# EAGLE board Line_Sensor v3 (EAGLE 9.7.0)
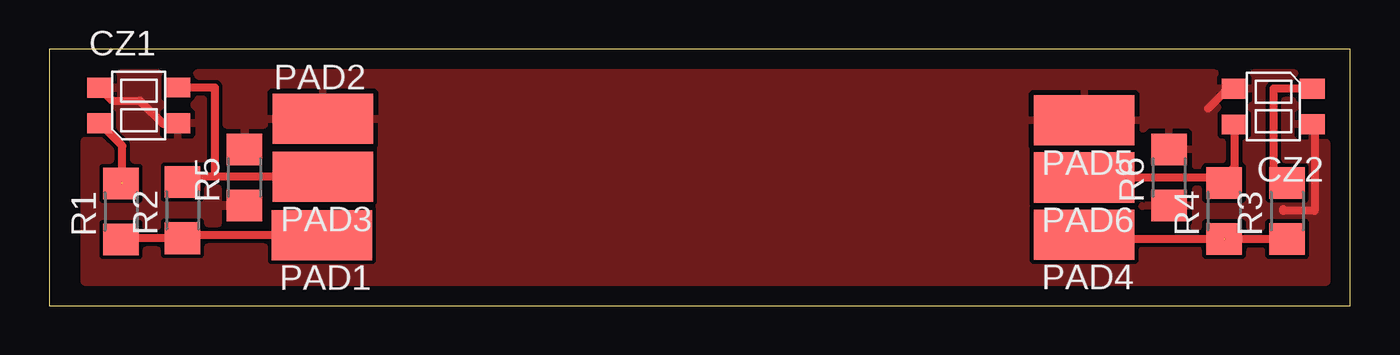
[diagram p0: board, top side]

Size 66 x 13 mm. Coordinates in mm from the lower left corner, seen from the top.
Outline: 0,0 66,0 66,13 0,13 0,0
Copper layers (1*16): Top / Bottom
Stack-up Default Layer Stack: Top User Defined 0.035mm / Dielectric-1 User Defined 1.5mm / Bottom User Defined 0.035mm
Design rules: minimum copper width 10mil, minimum drill size 24mil, copper clearance wire_polygon to wire_polygon 8mil, copper clearance wire_polygon to pad_smd 8mil, copper clearance wire_polygon to via 8mil, copper clearance pad_smd to pad_smd 8mil, copper clearance pad_smd to via 8mil, copper clearance via to via 8mil, copper clearance smd to pad (same net) 8mil, copper clearance smd to via (same net) 8mil, copper clearance smd to smd (same net) 8mil, dimension clearance 40mil, via restrict clearance 0mil, restrict clearance 0mil, drill distance 8mil, keepout clearance 0mil

## Footprints (pad centres in the part's own frame; a part is rotated, then mirrored left to right if it is on the bottom)
TOP = smd 1.27 x 1: ANODA -1.985,-0.9; EMITER -1.985,0.9; KATODA 1.985,-0.9; KOLEKTOR 1.985,0.91
SMD2,54-5,08 = smd 2.54 x 5.08: 1 0,0
R1206 = smd 1.6 x 1.803: 1 -1.422,0; 2 1.422,0

## Placement (x,y rotation side)
CZ1  KTIR0711S  [TOP]  4.54,10.15 0 top
CZ2  KTIR0711S  [TOP]  62.1,10.1 180 top
PAD1  [SMD2,54-5,08]  13.83,3.57 90 top
PAD2  [SMD2,54-5,08]  13.88,9.47 270 top
PAD3  [SMD2,54-5,08]  13.88,6.54 90 top
PAD4  [SMD2,54-5,08]  52.5,3.6 90 top
PAD5  [SMD2,54-5,08]  52.5,9.4 90 top
PAD6  [SMD2,54-5,08]  52.5,6.5 90 top
R1  200  [R1206]  3.64,4.78 90 top
R2  10k  [R1206]  6.76,4.84 90 top
R3  200  [R1206]  62.8,4.8 90 top
R4  10k  [R1206]  59.6,4.8 90 top
R5  ZW  [R1206]  9.9,6.5 90 top
R6  ZW  [R1206]  56.8,6.5 90 top

## Library data of the parts
CZ1 CZ2 = KTIR0711S
PAD1-PAD6 = wirepad
R1-R6 = rcl

## Nets
+3V3: PAD1.1 R1.1 R2.1
+5V: PAD4.1 R3.1 R4.1
GND: CZ1.EMITER CZ1.KATODA CZ2.EMITER CZ2.KATODA PAD2.1 PAD5.1 R5.1 R5.2 R6.1 R6.2
N$1: CZ1.ANODA R1.2
N$2: CZ2.ANODA R3.2
SIG: CZ1.KOLEKTOR PAD3.1 R2.2
SIG_2: CZ2.KOLEKTOR PAD6.1 R4.2

## Tracks (layer width: path | path; a pad name or v marks a point on that pad's centre or on a via)
+3V3
  Top 0.406: PAD1.1 6.91,3.57 R2.1 3.7,3.42 R1.1
+5V  (1 unrouted)
  Top 0.406: PAD4.1 52.7,3.4 59.6,3.4 | R3.1 R4.1
GND
  Top 0.406: CZ1.EMITER 3.21,10.4 4.6,10.4 5.8,9.2 6.6,9.2 | CZ2.EMITER 64.2,9.2 64.2,4.8 62.6,4.8 62.6,4.9 | CZ2.KATODA 59.8,11 58.8,10
  pour Top: 65,12.2 1.6,12.2 1.6,0.9 65,0.9
N$1  (1 unrouted)
  Top 0.406: CZ1.ANODA 3.7,8.1 3.7,6.2
N$2
  Top 0.406: CZ2.ANODA 62.1,11 62.1,6.2 62.8,6.2 R3.2
SIG
  Top 0.406: PAD3.1 8.4,6.54 | 8.4,6.54 6.94,6.54 R2.2 | CZ1.KOLEKTOR 8.4,11.06 8.4,6.54
SIG_2
  Top 0.406: PAD6.1 59.6,6.5 | 59.6,6.5 R4.2 | CZ2.KOLEKTOR 60.11,7.02 59.6,6.5